# Altium PCB microwaveBoardMicrostrip.PcbDoc
Units mm, origin at the board's own origin, x right, y up, seen from the top; angles counter-clockwise.
Board outline 85 x 25 mm, 2 copper layers (Top Layer, Bottom Layer), stack 1.594 mm thick; 2 components, 3 nets, 20 pads, 8 vias.
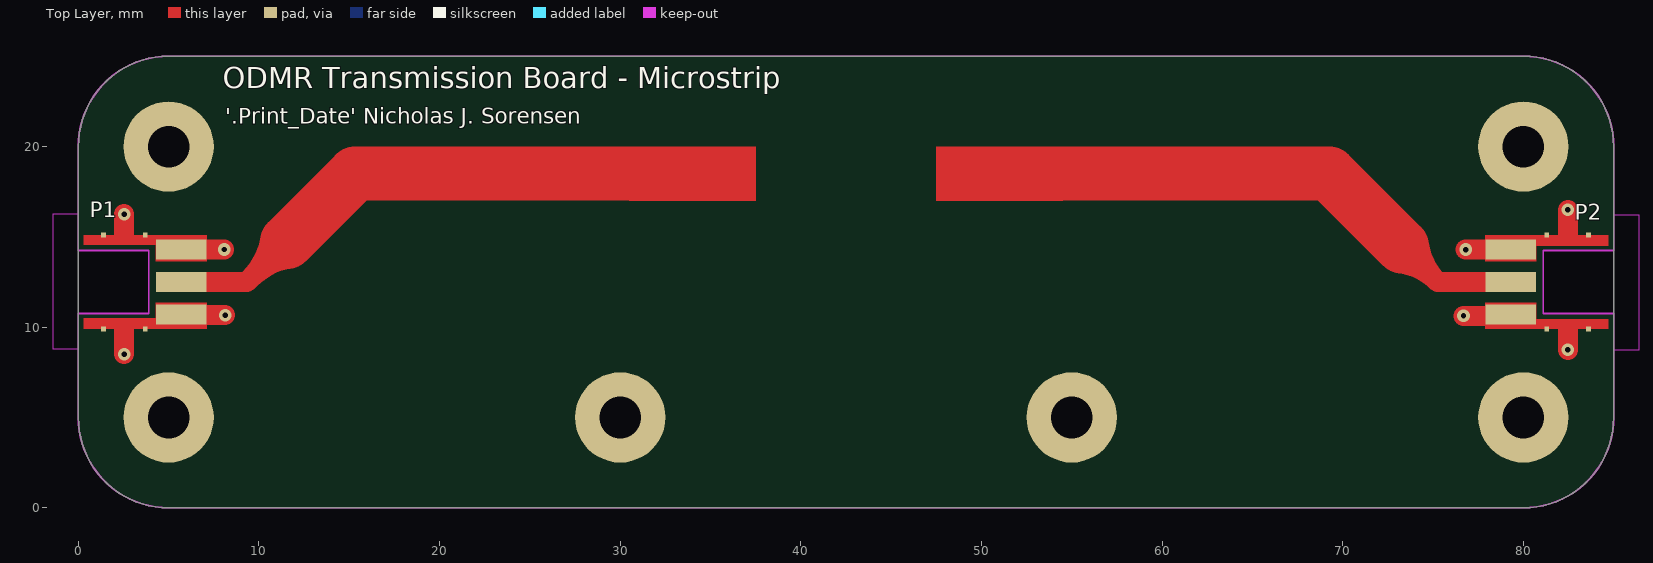
[diagram p0: Top Layer view]
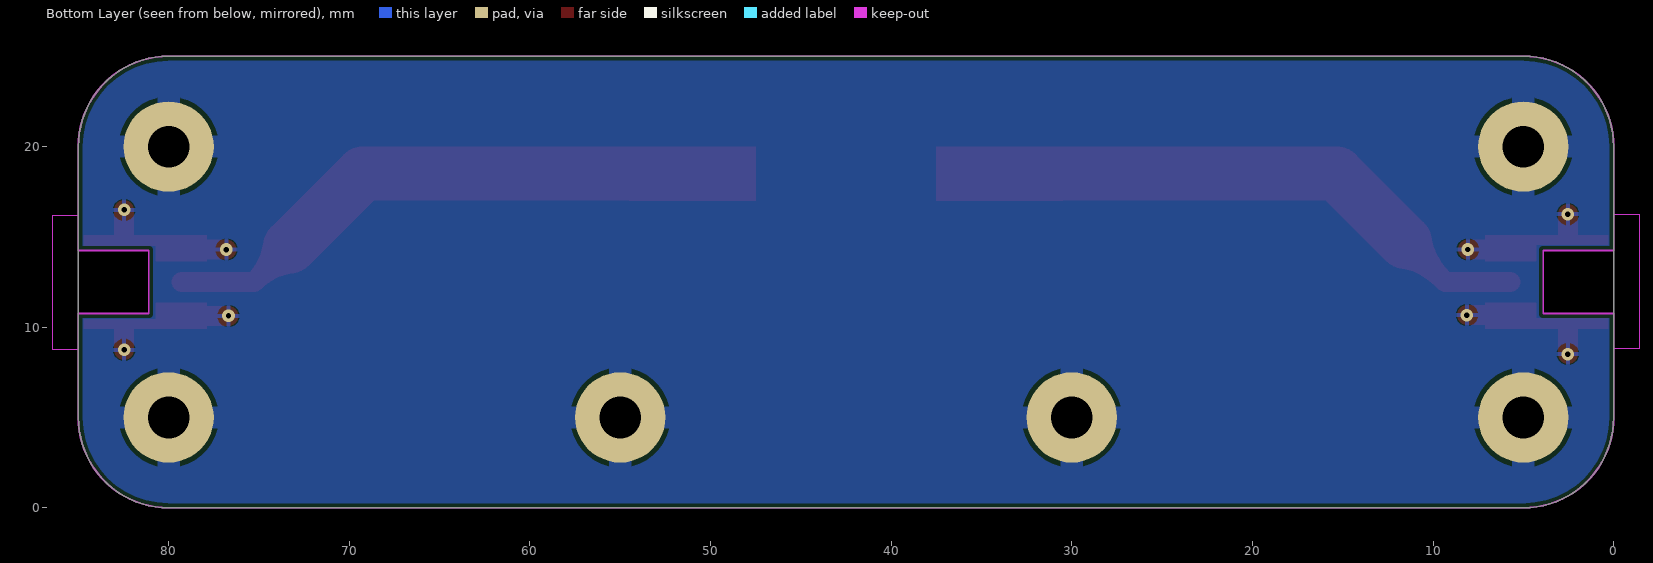
[diagram p1: Bottom Layer view, seen from below]

## Layer stack, top to bottom
Top Solder: solder mask 0.001, Solder Resist, Dk 4
Top Layer: signal copper 0.035
Dielectric 1: core 1.524, Core-043, Dk 4.3
Bottom Layer: signal copper 0.035
Bottom Solder: solder mask 0.001, Solder Resist, Dk 4

## Board outline
5,0 cw(c5,5) 0,5 0,20 cw(c5,20) 5,25 80,25 cw(c80,20) 85,20 85,5 cw(c80,5) 80,0

## Design rules (kind name [scope] priority, off if disabled: settings)
BoardOutlineClearance [All] p1: gap=0.2 ignorepadtopadclearanceinfootprint=FALSE
Clearance [All] p1: gap=0.2 ignorepadtopadclearanceinfootprint=FALSE
HoleSize [All] p1: absolutevalues=TRUE maxlimit=6.2 minlimit=0.2 maxpercent=80.000 minpercent=20.000
HoleToHoleClearance [All] p1: gap=0.4 allowstackedmicrovias=TRUE
MinimumAnnularRing [All] p1: minimumring=0.15
PolygonConnect [All] p1: connectstyle=Relief reliefconductorwidth=0.254 reliefentries=4 polygonreliefangle="90 Angle" airgapwidth=0.254
RoutingVias [All] p1: holewidth=0.3 width=0.7 viastyle="Through Hole" minholewidth=0.3 minwidth=0.7 maxholewidth=1 maxwidth=2
SilkToSilkClearance [All] p1: silktosilkclearance=0
SilkToSolderMaskClearance [IsPad] p1: minsilkscreentomaskgap=0.2 clearancetoexposedcopper=TRUE
SolderMaskExpansion [All] p1: expansion=0.102 istentingtop=FALSE
Width 50OhmMatching [InNetClass('All Nets')] p1: maxlimit=3 minlimit=1 preferedwidth=3 impedanceprofiledriven=TRUE impedanceprofileid={294760DC-FCD3-4A2D-A047-0DB9E9DF570D} impedanceprofilevalue=50.000000 minimp=50.000000 maximp=50.000000 favimp=50.000000
Width [All] p2: maxlimit=10 minlimit=0.1 preferedwidth=0.2 minimp=50.000000 maximp=50.000000 favimp=50.000000
26 further rules are at their usual default settings.

## Components (designator, comment, footprint, x,y, rotation, side; value= is the part's Value field where it differs from the comment)
P1 "MMCXV-J-P-HF-ST-EM1" MMCXV-J-P-HF-ST-EM1 0,12.5 r90 top
P2 "MMCXV-J-P-HF-ST-EM1" MMCXV-J-P-HF-ST-EM1 85,12.5 r270 top

## Footprints (in the part's own frame and the unit in brackets; to place one, negate y for a bottom-side part, rotate by r counter-clockwise, add the part's x,y. Pads: shape width x height; smd on the part's side, far side on the other; paste and mask are expansions set on the pad)
MMCXV-J-P-HF-ST-EM1 [mm]
  rect 1.1x2.8 smd: 1(0,-5.705)
  rect 0.254x0.254 smd: 2(-2.6,-1.395) 2(-2.6,-3.695) 2(2.6,-1.395) 2(2.6,-3.695)
  rect 1.1x2.8 smd paste-2 mask+0: 2(-1.8,-5.705) 2(1.8,-5.705)
  Top Layer region: 2.05,-4.295 1.15,-4.295 1.15,-7.105 2.6,-7.105 2.6,-0.305 2.05,-0.305
  Top Layer region: -2,-4.295 -1.15,-4.295 -1.15,-7.105 -2.6,-7.105 -2.6,-0.305 -2,-0.305
  Keep-Out Layer board cut-out: -3.7,0.005 -1.74,0.005 -1.74,-3.905 1.74,-3.905 1.74,0.005 3.75,0.005 3.75,1.405 -3.7,1.405
  Keep-Out Layer lines w0.1: -1.74,0.005 -1.74,-3.905 1.74,-3.905 1.74,0.005
  body extent -2.25,-6.71 2.25,0.69, height 2.11

## Part data
P1 P2: library part PXX-SAM-00013, "50 OHM MMCX HIGH-VIBRATION JACK,", Supplier Part Number 1=MMCXV-J-P-HF-ST-EM1-ND, Index=13, LatestRevisionDate=10/22/2021, LatestRevisionNote=..., Manufacturer Part Number=MMCXV-J-P-HF-ST-EM1, Part Number=PXX-SAM-00013, Published=10/22/2021, Publisher=AlbertaSat, Supplier 1=Digi-key, Supplier Link=#https://www.digikey.ca/en/products/detail/samtec-inc/MMCXV-J-P-HF-ST-EM1/10218387?s=N4IgTCBcDaILJwMIA0BqBaAUugCugEgGLoDKAKugKJwCMIAugL5A#

## Free pads (board coordinates)
  round 5 hole 2.3: ""(5,5) ""(5,20) ""(30,5) ""(55,5) ""(80,5) ""(80,20)

## Via types
v1: diameter 0.7, hole 0.3, Top Layer to Bottom Layer, tented both sides, 7 vias
v2: diameter 0.71, hole 0.3, Top Layer to Bottom Layer, tented both sides, 1 vias

## Nets (pads, with @x,y where several pads share a name; then routed paths per layer and width w, separated by ;. In a path a pad name is that pad's centre, name@x,y a point inside that pad or via, vN(x,y) a via of type N, cw(c..) or ccw(c..) an arc to the next point about the centre after c; other vN are vias at no path point)
GND: P1.2 P2.2 pad. | length 14.2
  Top Layer w1.1: v1(2.54,8.509) 2.54,9.83 ; 2.54,15.189 v1(2.54,16.256) ; P1.2@5.705,14.3 v2(8.077,14.3) ; P1.2@6.35,10.465 6.553,10.668 v1(8.128,10.668) ; v1(76.685,10.625) 78.645,10.625 78.645,10.7 P2.2@79.295,10.7 ; v1(76.802,14.297) 76.805,14.3 P2.2@79.295,14.3 ; v1(82.46,8.744) 82.46,9.811 ; 82.46,15.17 v1(82.46,16.491)
NetP1_1: P1.1 | length 28.3
  Top Layer w1.1: P1.1 9.325,12.5 11.557,14.732
  Top Layer w3: 11.557,14.732 15.325,18.5 31.5,18.5
NetP2_1: P2.1 | length 27.3
  Top Layer w1.1: 73.279,14.478 75.257,12.5 P2.1
  Top Layer w3: 54.5,18.5 69.257,18.5 73.279,14.478

## Polygon pours and split planes (outlines as drawn)
GND on Bottom Layer "GND_L02_P000" (solid, pour order 0): -1.524,26.543 -1.016,26.035 85.598,26.035 85.598,-2.54 84.582,-1.524 -2.54,-1.524

## Keep-outs
Keep-Out Layer:
  lines w0.1: -0.005,10.76 0,5 ; 85,20 85.005,14.24
  lines w0.102: 0,5 ccw(c5,5) 5,0 80,0 ccw(c80,5) 85,5 85,10.76 ; 0,14.24 0,20 cw(c5,20) 5,25 80,25 cw(c80,20) 85,20

## Other copper
Top Layer:
  region net NetP2_1: 50.5,17 50.5,20 47.5,20 47.5,17
  region net NetP2_1: 50.5,20 50.5,17 51.5,17 51.5,20
  region net NetP2_1: 51.5,20 51.5,17 54.5,17 54.5,20
  region net NetP1_1: 33.5,17 33.5,20 30.5,20 30.5,17
  region net NetP1_1: 34.5,17 34.5,20 33.5,20 33.5,17
  region net NetP1_1: 34.5,20 34.5,17 37.5,17 37.5,20

## Silkscreen, mask and mechanical layers (free items; w line width, h text height)
Top Overlay:
  text "ODMR Transmission Board - Microstrip" at 8.001,22.835 h2
  text "'.Print_Date' Nicholas J. Sorensen" at 8.128,20.955 h1.5
Mechanical 1:
  the board outline again, w0.254